# Altium PCB HQBCC2.PcbDoc
Units mm, origin at the board's own origin, x right, y up, seen from the top; angles counter-clockwise.
Board outline 90 x 50 mm, 2 copper layers (Top Layer, Bottom Layer); 38 components, 0 nets, 589 pads, 0 vias.
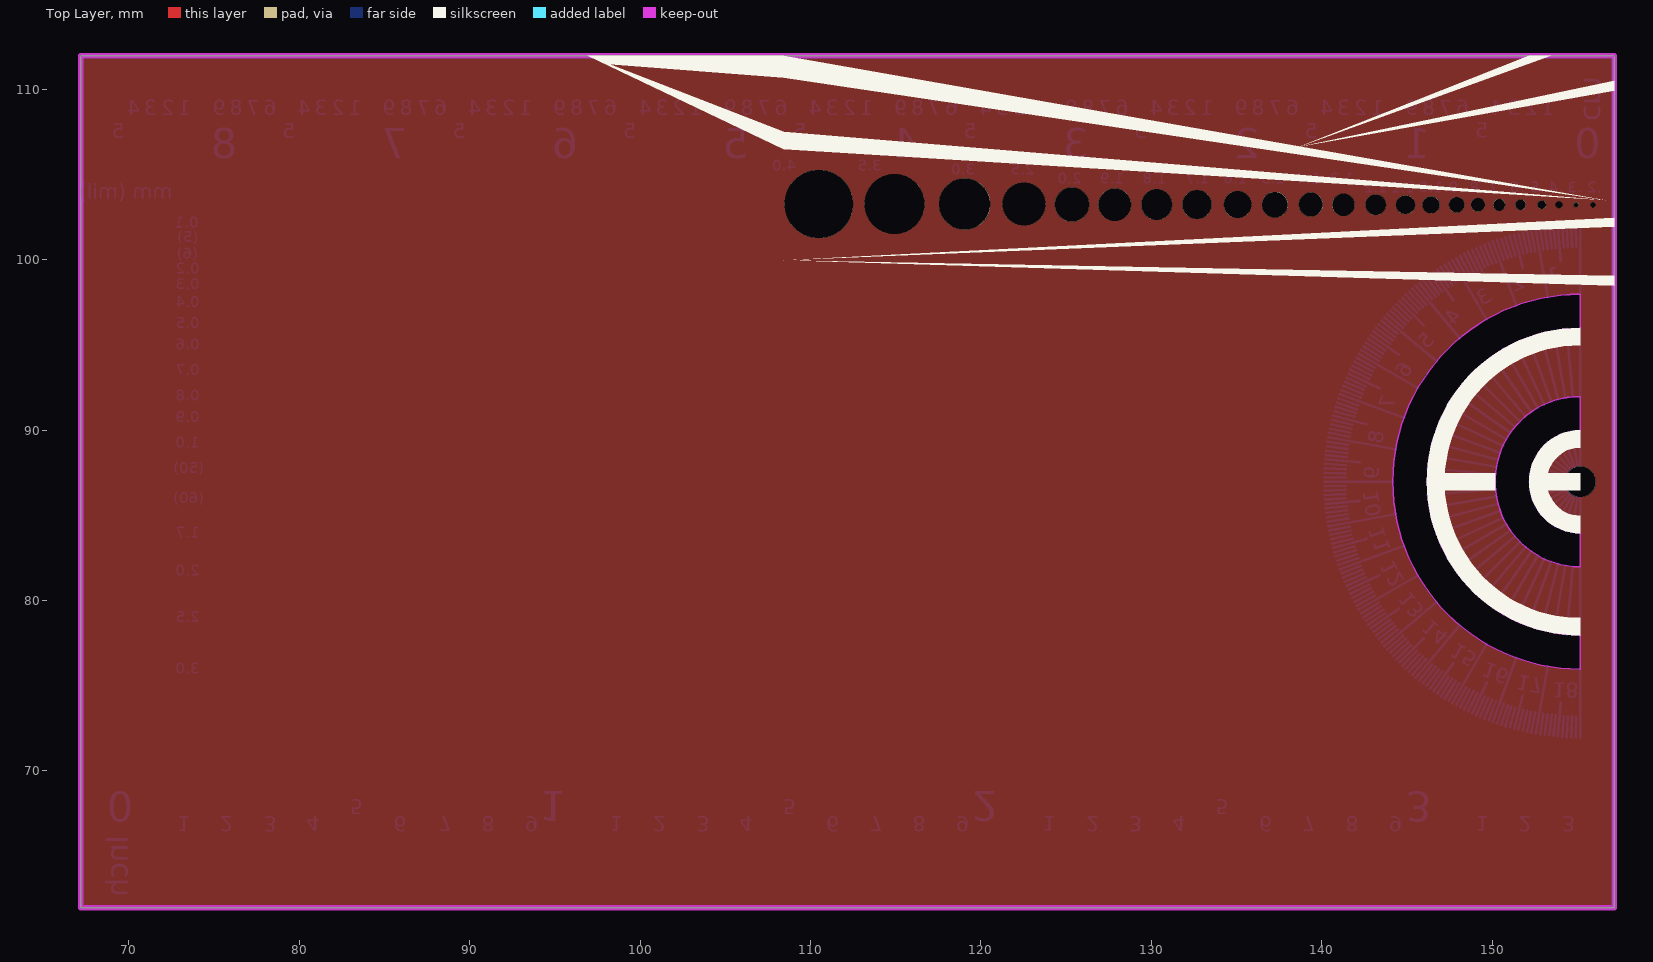
[diagram p0: Top Layer view]
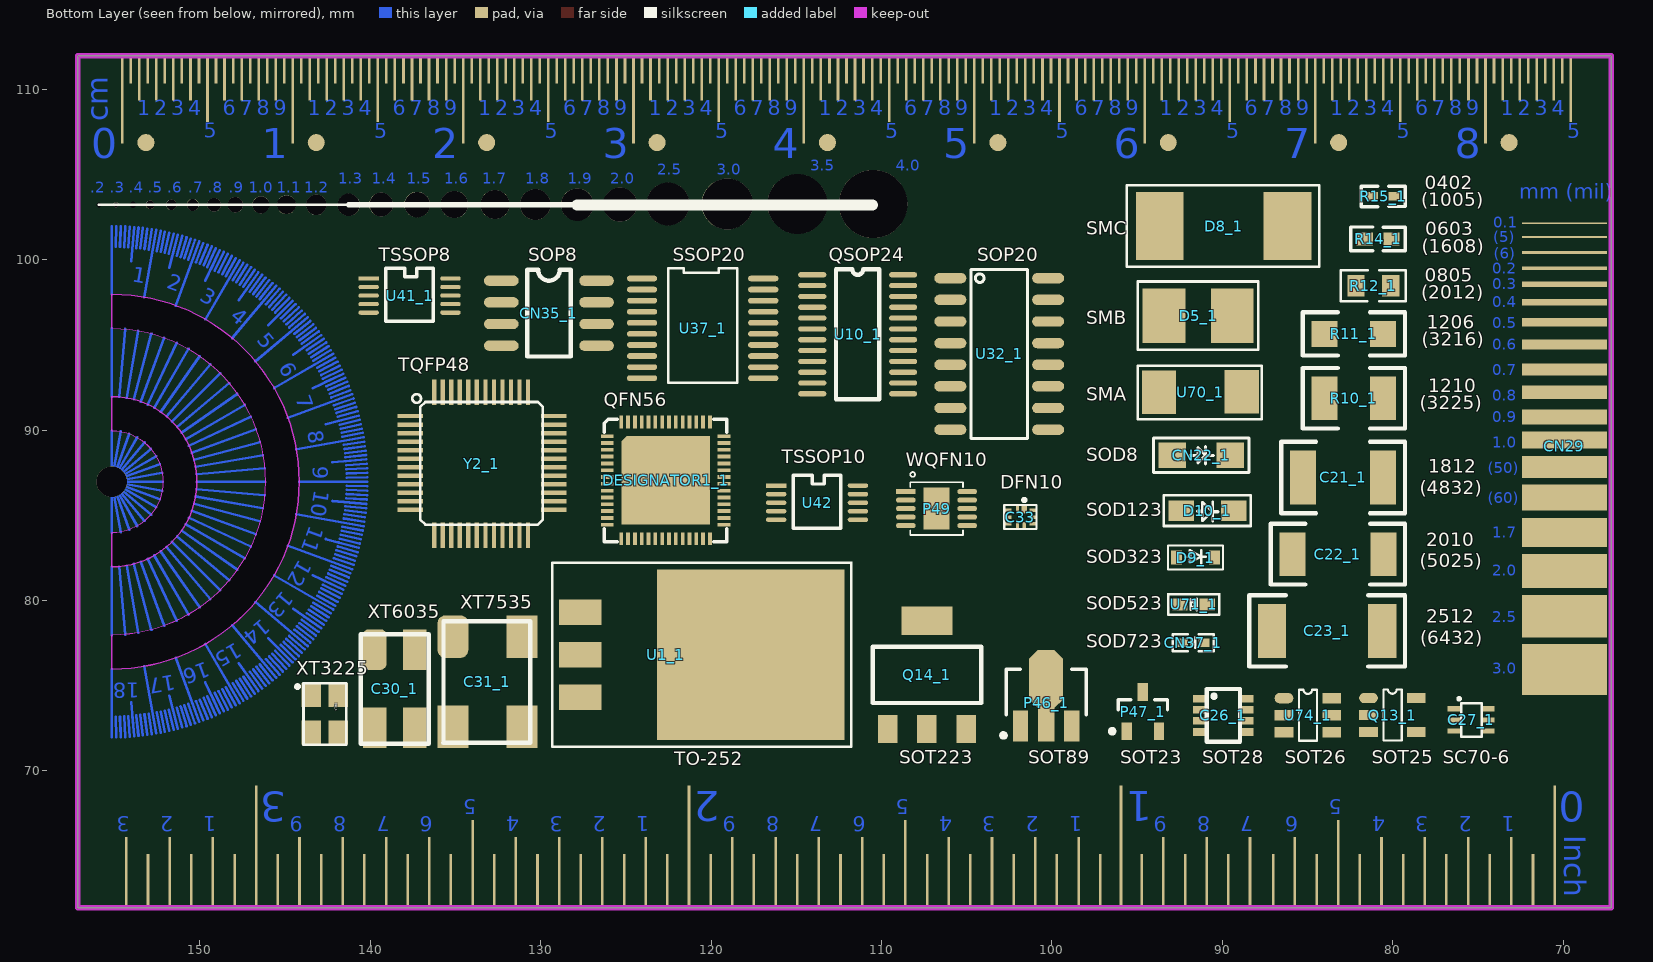
[diagram p1: Bottom Layer view, seen from below]

## Layer stack, top to bottom
Top Solder: solder mask 0.0102, Solder Resist, Dk 3.5
Top Layer: signal copper 0.0356
Dielectric 1: dielectric 0.32, FR-4, Dk 4.8
Bottom Layer: signal copper 0.0356
Bottom Solder: solder mask 0.0102, Solder Resist, Dk 3.5

## Board outline
157.175,61.976 157.175,111.976 67.175,111.976 67.175,61.976
cut-out: 155.175,77.976 155.175,75.976 cw(c155.175,86.976) 155.175,97.976 155.175,95.976 ccw(c155.175,86.976)
cut-out: 155.175,83.976 155.175,81.976 cw(c155.175,86.976) 155.175,91.976 155.175,89.976 ccw(c155.175,86.976)

## Design rules (kind name [scope] priority, off if disabled: settings)
Clearance [All] p1 off: gap=0.127 ignorepadtopadclearanceinfootprint=FALSE
ComponentClearance [All] p1 off: gap=0.254 collisioncheckmode=3 verticalgap=0.254 showdistances=FALSE
Height [All] p1 off: minheight=0 maxheight=25.4 prefheight=12.7
PolygonConnect [All] p1: connectstyle=Relief reliefconductorwidth=0.254 reliefentries=4 polygonreliefangle="90 Angle" airgapwidth=0.254
RoutingVias [All] p1: holewidth=0.711 width=1.27 viastyle="Through Hole" minholewidth=0.711 minwidth=1.27 maxholewidth=0.711 maxwidth=1.27
SolderMaskExpansion [All] p1: expansion=0.102
Width [All] p1: maxlimit=25.4 minlimit=0.152 preferedwidth=0.152
28 further rules are at their usual default settings.

## Components (designator, comment, footprint, x,y, rotation, side; value= is the part's Value field where it differs from the comment)
C21_1 "1812" 1812 82.92,87.226 r180 bottom
C22_1 "2010" 2010 83.225,82.726 r180 bottom
C23_1 "2512" 2512 83.86,78.226 r180 bottom
C26_1 "SOT28" SOT28 89.941,73.265 r180 bottom
C27_1 "SC70-6" SC70-6 75.407,72.999 r270 bottom
C30_1 "XT6035SMD" XT6035SMD 138.565,74.827 r270 bottom
C31_1 "XT7535SMD" XT7535SMD 133.153,75.589 r270 bottom
C32_1 "XT3225SMD" XT3225SMD 142.675,73.351 r270 bottom
C33 "WQFN10" WQFN10 101.825,84.901 r0 bottom
CN22_1 "IN4148" IN4148 91.242,88.527 r0 bottom
CN29 "PITCHAAAAA" PITCHAAAAA 73.406,87.917 r180 bottom
CN35_1 "SOP-8" SOP-8 132.313,98.771 r180 bottom
CN37_1 "SOD723" SOD723 91.709,77.527 r180 bottom
D5_1 "SMB" SMB 91.425,96.726 r90 bottom
D8_1 "SMC" SMC 89.922,101.976 r180 bottom
D9_1 "SOD323" SOD323 91.459,82.527 r180 bottom
D10_1 "SOD-123FL1AAA-DY" SOD-123FL1AAA-DY 90.827,85.277 r0 bottom
DESIGNATOR1_1 "QFN56" QFN56 126.175,83.551 r180 bottom
P46_1 "Comment" SOT-89 100.345,74.061 r90 bottom
P47_1 "Comment" SOT23-3 94.668,73.483 r90 bottom
P49 "Comment" DFN-10 106.775,85.401 r180 bottom
Q13_1 "SOT25" SOT25 80.025,73.23 r180 bottom
Q14_1 "SOT223" SOT223 107.335,75.645 r180 bottom
R10_1 "1210" 1210 82.285,91.876 r180 bottom
R11_1 "1206" 1206 82.285,95.651 r0 bottom
R12_1 "0805" 0805 81.138,98.476 r0 bottom
R14_1 "0603" 0603 80.864,101.226 r0 bottom
R15_1 "0402" 0402 80.56,103.726 r180 bottom
U1_1 "AIC1084AAAAAA" AIC1084AAAAAA 124.675,76.826 r270 bottom
U10_1 "QSOP24" QSOP24 111.4,95.626 r180 bottom
U32_1 "74HC139" 74HC139 103.095,94.476 r270 bottom
U37_1 "SSOP-PCM1606E" SSOP-PCM1606E 120.5,94.676 r180 bottom
U41_1 "TSSOP-10" TSSOP-10 137.7,97.901 r270 bottom
U42 "TSSOP-10" TSSOP-10 113.787,85.746 r270 bottom
U70_1 "SMA" SMA 93.425,92.226 r180 bottom
U71_1 "SOD523-DY#" SOD523-DY# 91.684,79.777 r180 bottom
U74_1 "SOT26" SOT26 84.986,73.276 r180 bottom
Y2_1 "TQFP48" TQFP48 133.5,88.076 r180 bottom

## Footprints (in the part's own frame and the unit in brackets; to place one, negate y for a bottom-side part, rotate by r counter-clockwise, add the part's x,y. Pads: shape width x height; smd on the part's side, far side on the other; paste and mask are expansions set on the pad)
74HC139 [mil]
  oval 24x74 smd: 1(-175,-113) 2(-125,-113) 3(-75,-113) 4(-25,-113) 5(25,-113) 6(75,-113) 7(125,-113) 8(175,-113) 9(175,113) 10(125,113) 11(75,113) 12(25,113) 13(-25,113) 14(-75,113) 15(-125,113) 16(-175,113)
  silkscreen extent -195,-65 195,65
0402 [mil]
  rect 25x20 smd: 1(-25,0) 2(25,0)
  silkscreen extent -51,-24 51,24
0603 [mil]
  rect 38x30 smd: 1(-31,0) 2(31,0)
  silkscreen extent -63,-28 63,28
0805 [mil]
  rect 40x50 smd: 1(-40,0) 2(40,0)
  silkscreen extent -75,-36 75,36
1206 [mil]
  rect 60x60 smd: 1(-67.5,0) 2(67.5,0)
  silkscreen extent -118,-50 118,50
1210 [mil]
  rect 60x100 smd: 1(-67.5,0) 2(67.5,0)
  silkscreen extent -118,-70 118,70
1812 [mil]
  rect 60x125 smd: 1(-92.5,0) 2(92.5,0)
  silkscreen extent -143,-83 143,83
2010 [mil]
  rect 60x100 smd: 1(-105,0) 2(105,0)
  silkscreen extent -155,-70 155,70
2512 [mil]
  rect 65x125 smd: 1(-127.5,0) 2(127.5,0)
  silkscreen extent -180,-83 180,83
AIC1084AAAAAA [mm]
  rect 1.5x2.5 smd: 1(-2.5,-3) 2(0,-3) 3(2.5,-3)
  rect 10x11 smd: 4(0,7)
  silkscreen extent -5.4,-4.65 5.4,12.9
DFN-10 [mm]
  rect 1.15x0.3 smd: 1(-1.8,1)
  oval 1.15x0.3 smd: 2(-1.8,0.5) 3(-1.8,0) 4(-1.8,-0.5) 5(-1.8,-1) 6(1.8,-1) 7(1.8,-0.5) 8(1.8,0) 9(1.8,0.5) 10(1.8,1)
  rect 1.55x2.48 smd: 11(0,0)
  silkscreen extent -1.55,-1.55 1.55,2.14, body extent -1.5,-1.5 1.5,1.5, height 0.8
IN4148 [mm]
  rect 1.6x1.5 smd: 1(-1.7,0) 2(1.7,0)
  silkscreen extent -2.81,-1 2.8,1.02
PITCHAAAAA [mm]
  rect 5x0.1 smd: 1(3.481,14.233)
  rect 5x0.127 smd: 2(3.481,13.428)
  rect 5x0.152 smd: 3(3.481,12.507)
  rect 5x0.2 smd: 4(3.481,11.589)
  rect 5x0.3 smd: 5(3.481,10.647)
  rect 5x0.4 smd: 6(3.481,9.592)
  rect 5x0.5 smd: 7(3.481,8.409)
  rect 5x0.6 smd: 8(3.481,7.105)
  rect 5x0.7 smd: 9(3.481,5.645)
  rect 5x0.8 smd: 10(3.481,4.311)
  rect 5x0.9 smd: 11(3.481,2.852)
  rect 5x1 smd: 12(3.481,1.509)
  rect 5x1.27 smd: 13(3.481,-0.081)
  rect 5x1.524 smd: 14(3.481,-1.874)
  rect 5x1.7 smd: 15(3.481,-3.915)
  rect 5x2 smd: 16(3.481,-6.191)
  rect 5x2.5 smd: 17(3.481,-8.84)
  rect 5x3 smd: 18(3.481,-11.971)
QFN56 [mm]
  rect 0.75x0.22 smd: 1(0.075,6.1) 2(0.075,5.7) 3(0.075,5.3) 4(0.075,4.9) 5(0.075,4.5) 6(0.075,4.1) 7(0.075,3.7) 8(0.075,3.3) 9(0.075,2.9) 10(0.075,2.5) 11(0.075,2.1) 12(0.075,1.7) 13(0.075,1.3) 14(0.075,0.9) 29(6.925,0.9) 30(6.925,1.3) 31(6.925,1.7) 32(6.925,2.1) 33(6.925,2.5) 34(6.925,2.9) 35(6.925,3.3) 36(6.925,3.7) 37(6.925,4.1) 38(6.925,4.5) 39(6.925,4.9) 40(6.925,5.3) 41(6.925,5.7) 42(6.925,6.1)
  rect 0.22x0.75 smd: 15(0.9,0.075) 16(1.3,0.075) 17(1.7,0.075) 18(2.1,0.075) 19(2.5,0.075) 20(2.9,0.075) 21(3.3,0.075) 22(3.7,0.075) 23(4.1,0.075) 24(4.5,0.075) 25(4.9,0.075) 26(5.3,0.075) 27(5.7,0.075) 28(6.1,0.075) 43(6.1,6.925) 44(5.7,6.925) 45(5.3,6.925) 46(4.9,6.925) 47(4.5,6.925) 48(4.1,6.925) 49(3.7,6.925) 50(3.3,6.925) 51(2.9,6.925) 52(2.5,6.925) 53(2.1,6.925) 54(1.7,6.925) 55(1.3,6.925) 56(0.9,6.925)
  rect 5.2x4.9 smd: 57(3.5,3.35)
  oct 1.2x1.2 smd: $$$1(1.5,5.5)
  rect 4.5x0.3 smd: $$$2(3.85,5.95)
  silkscreen extent -0.1,-0.1 7.1,7.1
QSOP24 [mil]
  oval 65x12 smd: 1(-105,137.5) 2(-105,112.5) 3(-105,87.5) 4(-105,62.5) 5(-105,37.5) 6(-105,12.5) 7(-105,-12.5) 8(-105,-37.5) 9(-105,-62.5) 10(-105,-87.5) 11(-105,-112.5) 12(-105,-137.5) 13(105,-137.5) 14(105,-112.5) 15(105,-87.5) 16(105,-62.5) 17(105,-37.5) 18(105,-12.5) 19(105,12.5) 20(105,37.5) 21(105,62.5) 22(105,87.5) 23(105,112.5) 24(105,137.5)
  silkscreen extent -50,-150 50,150
SC70-6 [mm]
  rect 0.3x0.8 smd: 1(-0.65,-0.975) 2(0,-0.975) 3(0.65,-0.975) 4(0.65,0.975) 5(0,0.975) 6(-0.65,0.975)
  silkscreen extent -1.32,-0.78 0.98,0.63
SMA [mm]
  rect 2x2.54 smd: 1(4.562,0.022) 2(-0.297,0.001)
  silkscreen extent -1.54,-1.58 5.74,1.55
SMB [mm]
  rect 3.2x2.5 smd: 1(0,2) 2(0,-2)
  silkscreen extent -2,-3.53 2,3.55
SMC [mm]
  rect 2.8x4 smd: 1(3.746,0) 2(-3.746,0)
  silkscreen extent -5.7,-2.4 5.6,2.4
SOD323 [mm]
  rect 0.63x0.83 smd: 1(-1.235,-0.001) 2(0.995,-0.001)
  silkscreen extent -1.74,-0.7 1.5,0.7
SOD523-DY# [mm]
  rect 0.9x0.7 smd: 1(-0.8,0) 2(0.8,0)
  silkscreen extent -1.5,-0.61 1.5,0.6
SOD723 [mil]
  rect 25x20 smd: 1(-25,0) 2(25,0)
  silkscreen extent -47,-20 47,20
SOD-123FL1AAA-DY [mm]
  rect 1.5x1.2 smd: 1(-1.5,0) 2(1.6,0)
  silkscreen extent -2.5,-0.9 2.61,0.9
SOP-8 [mil]
  oval 80x24 smd: 1(0,0) 2(0,-50) 3(0,-100) 4(0,-150) 5(220,-150) 6(220,-100) 7(220,-50) 8(220,0)
  silkscreen extent 60,-175 160,25
SOT23-3 [mm] "SOT23, 3-Leads, Body 3.0x2.5mm (max), Pitch 0.95mm, IPC Medium Density"
  rect 1.05x0.6 smd: 1(-1.15,0.95) 2(-1.15,-0.95) 3(1.15,0)
  silkscreen extent -1.27,-1.45 0.7,1.93, body extent -1.2,-1.45 1.2,1.45, height 1
SOT25 [mm]
  oval 1.1x0.6 smd: 1(-1.4,1.052)
  rect 1.1x0.6 smd: 2(-1.4,0.052) 3(-1.4,-0.948) 4(1.4,-0.948) 5(1.4,1.052)
  silkscreen extent -0.52,-1.45 0.55,1.55
SOT26 [mm]
  oval 1.1x0.6 smd: 1(-1.4,0.996)
  rect 1.1x0.6 smd: 2(-1.4,-0.004) 3(-1.4,-1.004) 4(1.4,-1.004) 5(1.4,-0.004) 6(1.4,0.996)
  silkscreen extent -0.52,-1.5 0.55,1.5
SOT28 [mm]
  rect 0.8x0.45 smd: 1(-1.375,0.975) 2(-1.375,0.325) 3(-1.375,-0.325) 4(-1.375,-0.975) 5(1.375,-0.975) 6(1.375,-0.325) 7(1.375,0.325) 8(1.375,0.975)
  silkscreen extent -0.97,-1.55 0.97,1.55
SOT223 [mil]
  rect 45x65 smd: 1(-91,-125) 2(0,-125) 3(91,-125)
  rect 118x65 smd: 4(0,125)
  silkscreen extent -125,-65 125,65
SOT-89 [mm] "SOT89, 3-Leads, Body 4.5x2.5mm (max), Pitch 1.50mm, Lead Span 3.6mm, IPC Medium Density"
  rect 1.8x0.9 smd: 1(-1.425,1.5) 3(-1.425,-1.5)
  rect 2x0.96 smd: 2(-1.325,0)
  oct 3.4x2 smd: 2(1.325,0)
  silkscreen extent -2.1,-2.35 1.91,2.63, body extent -1.9,-2.35 2.4,2.35, height 1.65
SSOP-PCM1606E [mil]
  oval 70x13 smd: 1(-140,166.4) 2(-140,140.8) 3(-140,115.2) 4(-140,89.6) 5(-140,64) 6(-140,38.4) 7(-140,12.8) 8(-140,-12.8) 9(-140,-38.4) 10(-140,-64) 11(140,-64) 12(140,-38.4) 13(140,-12.8) 14(140,12.8) 15(140,38.4) 16(140,64) 17(140,89.6) 18(140,115.2) 19(140,140.8) 20(140,166.4)
  silkscreen extent -80,-75 80,190
TQFP48 [mm]
  rect 1.5x0.25 smd: 1(-4.15,2.75) 2(-4.15,2.25) 3(-4.15,1.75) 4(-4.15,1.25) 5(-4.15,0.75) 6(-4.15,0.25) 7(-4.15,-0.25) 8(-4.15,-0.75) 9(-4.15,-1.25) 10(-4.15,-1.75) 11(-4.15,-2.25) 12(-4.15,-2.75) 25(4.25,-2.75) 26(4.25,-2.25) 27(4.25,-1.75) 28(4.25,-1.25) 29(4.25,-0.75) 30(4.25,-0.25) 31(4.25,0.25) 32(4.25,0.75) 33(4.25,1.25) 34(4.25,1.75) 35(4.25,2.25) 36(4.25,2.75)
  rect 0.25x1.5 smd: 13(-2.75,-4.25) 14(-2.25,-4.25) 15(-1.75,-4.25) 16(-1.25,-4.25) 17(-0.75,-4.25) 18(-0.25,-4.25) 19(0.25,-4.25) 20(0.75,-4.25) 21(1.25,-4.25) 22(1.75,-4.25) 23(2.25,-4.25) 24(2.75,-4.25) 37(2.75,4.15) 38(2.25,4.15) 39(1.75,4.15) 40(1.25,4.15) 41(0.75,4.15) 42(0.25,4.15) 43(-0.25,4.15) 44(-0.75,4.15) 45(-1.25,4.15) 46(-1.75,4.15) 47(-2.25,4.15) 48(-2.75,4.15)
  silkscreen extent -4.04,-3.62 3.62,4.04
TSSOP-10 [mm]
  rect 0.254x1.2 smd: 1(-1,-2.4)
  oval 0.254x1.2 smd: 2(-0.5,-2.4) 3(0,-2.4) 4(0.5,-2.4) 5(1,-2.4) 6(1,2.4) 7(0.5,2.4) 8(0,2.4) 9(-0.5,2.4) 10(-1,2.4)
  silkscreen extent -1.6,-1.4 1.5,1.4
WQFN10 [mm]
  rect 0.3x0.5 smd: 1(-0.2,-0.45)
  rect 0.2x0.4 smd: 2(0.2,-0.5) 6(0.2,0.5) 7(-0.2,0.5)
  rect 0.4x0.2 smd: 3(0.762,-0.4) 4(0.762,0) 5(0.762,0.4) 8(-0.7,0.4) 9(-0.7,0) 10(-0.7,-0.4)
  silkscreen extent -0.91,-1.08 0.98,0.7
XT3225SMD [mm]
  rect 1.4x1.15 smd: 1(-1.1,-0.8) 2(1.1,-0.8) 3(1.1,0.8) 4(-1.1,0.8)
  silkscreen extent -1.8,-1.7 1.8,1.25
XT6035SMD [mm]
  rrect50% 2.38x1.38 smd: 1(-2.3,-1.18)
  rect 2.38x1.38 smd: 2(2.3,1.18) 3(-2.3,1.18) 4(2.3,-1.18)
  silkscreen extent -3.2,-2 3.23,2
XT7535SMD [mm]
  rrect50% 2.5x1.8 smd: 1(-2.3,-2)
  rect 2.5x1.8 smd: 2(3,2.05) 3(-2.3,2.05) 4(3,-2)
  silkscreen extent -3.2,-2.57 3.94,2.54

## Free pads (board coordinates)
  round 0.2 hole 0.3 unplated: 22(155.925,103.226)
  round 0.3 hole 0.3 unplated: 23(154.925,103.226)
  round 0.3 hole 0.4 unplated: 24(153.925,103.226)
  round 0.6 hole 0.6 unplated: 25(151.675,103.226)
  round 0.5 hole 0.5 unplated: 25(152.925,103.226)
  round 0.7 hole 0.7 unplated: 26(150.425,103.226)
  round 0.8 hole 0.8 unplated: 27(149.175,103.226)
  round 0.9 hole 0.9 unplated: 28(147.925,103.226)
  round 1 hole 1 unplated: 29(146.425,103.226)
  round 1.1 hole 1.1 unplated: 30(144.925,103.226)
  round 1.2 hole 1.2 unplated: 31(143.175,103.226)
  round 1.3 hole 1.3 unplated: 32(141.275,103.226)
  round 2 hole 2 unplated: 33(125.345,103.24)
  round 1.9 hole 1.9 unplated: 34(127.86,103.24)
  round 1 smd far side: 35(73.175,106.876) 35(83.175,106.876) 35(93.175,106.876) 35(103.175,106.876) 35(113.175,106.876) 35(123.175,106.876) 35(133.175,106.876) 35(143.175,106.876) 35(153.175,106.876)
  round 1.8 hole 1.8 unplated: 35(130.324,103.24) 35(155.175,86.976)
  round 1.7 hole 1.7 unplated: 36(132.686,103.24)
  round 1.6 hole 1.6 unplated: 37(135.073,103.24)
  round 1.5 hole 1.5 unplated: 38(137.258,103.24)
  round 1.4 hole 1.4 unplated: 39(139.366,103.24)
  round 3 hole 3 unplated: 40(119.053,103.274)
  round 2.5 hole 2.5 unplated: 41(122.533,103.274)
  round 3.5 hole 3.5 unplated: 42(114.938,103.274)
  round 4 hole 4 unplated: 43(110.493,103.274)
  rect 0.15x4 smd far side: 275(154.321,64.137) 277(151.781,64.137) 279(149.241,64.137) 283(144.161,64.137) 285(141.621,64.137) 287(139.081,64.137) 289(136.541,64.137) 293(131.461,64.137) 295(128.921,64.137) 297(126.381,64.137) 299(123.841,64.137) 303(118.761,64.137) 305(116.221,64.137) 307(113.681,64.137) 309(111.141,64.137) 313(106.061,64.137) 315(103.521,64.137) 317(100.981,64.137) 319(98.441,64.137) 323(93.461,64.137) 325(90.921,64.137) 327(88.381,64.137) 329(85.741,64.137) 333(80.661,64.137) 335(78.121,64.137) 337(75.581,64.137) 339(73.041,64.137)
  rect 0.15x3 smd far side: 276(153.051,63.637) 278(150.511,63.637) 280(147.971,63.637) 282(145.431,63.637) 284(142.891,63.637) 286(140.351,63.637) 288(137.811,63.637) 290(135.271,63.637) 292(132.731,63.637) 294(130.191,63.637) 296(127.651,63.637) 298(125.111,63.637) 300(122.571,63.637) 302(120.031,63.637) 304(117.491,63.637) 306(114.951,63.637) 308(112.411,63.637) 310(109.871,63.637) 312(107.331,63.637) 314(104.791,63.637) 316(102.251,63.637) 318(99.711,63.637) 320(97.171,63.637) 322(94.731,63.637) 324(92.191,63.637) 326(89.651,63.637) 328(87.011,63.637) 330(84.471,63.637) 332(81.931,63.637) 334(79.391,63.637) 336(76.851,63.637) 338(74.311,63.637) 340(71.771,63.637)
  rect 0.15x7 smd far side: 281(146.701,65.637) 301(95.951,65.637) 301(121.301,65.637) 341(70.501,65.637)
  rect 0.15x5 smd far side: 291(134.001,64.637) 311(108.601,64.637) 331(83.201,64.637)
  rect 0.152x5 smd far side: 362(154.559,109.337) 372(144.559,109.337) 382(134.559,109.337) 392(124.559,109.337) 402(114.559,109.337) 412(104.559,109.337) 422(94.559,109.337) 432(84.559,109.337) 442(74.559,109.337)
  rect 0.152x2.5 smd far side: 363(153.559,110.587) 364(152.559,110.587) 365(151.559,110.587) 366(150.559,110.587) 368(148.559,110.587) 369(147.559,110.587) 370(146.559,110.587) 371(145.559,110.587) 373(143.559,110.587) 374(142.559,110.587) 375(141.559,110.587) 376(140.559,110.587) 378(138.559,110.587) 379(137.559,110.587) 380(136.559,110.587) 381(135.559,110.587) 383(133.559,110.587) 384(132.559,110.587) 385(131.559,110.587) 386(130.559,110.587) 388(128.559,110.587) 389(127.559,110.587) 390(126.559,110.587) 391(125.559,110.587) 393(123.559,110.587) 394(122.559,110.587) 395(121.559,110.587) 396(120.559,110.587) 398(118.559,110.587) 399(117.559,110.587) 400(116.559,110.587) 401(115.559,110.587) 403(113.559,110.587) 404(112.559,110.587) 405(111.559,110.587) 406(110.559,110.587) 408(108.559,110.587) 409(107.559,110.587) 410(106.559,110.587) 411(105.559,110.587) 413(103.559,110.587) 414(102.559,110.587) 415(101.559,110.587) 416(100.559,110.587) 418(98.559,110.587) 419(97.559,110.587) 420(96.559,110.587) 421(95.559,110.587) 423(93.559,110.587) 424(92.559,110.587) 425(91.559,110.587) 426(90.559,110.587) 428(88.559,110.587) 429(87.559,110.587) 430(86.559,110.587) 431(85.559,110.587) 433(83.559,110.587) 434(82.559,110.587) 435(81.559,110.587) 436(80.559,110.587) 438(78.559,110.587) 439(77.559,110.587) 440(76.559,110.587) 441(75.559,110.587) 443(73.559,110.587) 444(72.559,110.587) 445(71.559,110.587) 446(70.559,110.587)
  rect 0.152x3.75 smd far side: 367(149.559,109.962) 377(139.559,109.962) 387(129.559,109.962) 397(119.559,109.962) 407(109.559,109.962) 417(99.559,109.962) 427(89.559,109.962) 437(79.559,109.962) 447(69.559,109.962)
  rect 0.152x1.5 smd far side: 563(154.059,111.087) 564(153.059,111.087) 565(152.059,111.087) 566(151.059,111.087) 567(150.059,111.087) 568(149.059,111.087) 569(148.059,111.087) 570(147.059,111.087) 571(146.059,111.087) 572(145.059,111.087) 573(144.059,111.087) 574(143.059,111.087) 575(142.059,111.087) 576(141.059,111.087) 577(140.059,111.087) 578(139.059,111.087) 579(138.059,111.087) 580(137.059,111.087) 581(136.059,111.087) 582(135.059,111.087) 583(134.059,111.087) 584(133.059,111.087) 585(132.059,111.087) 586(131.059,111.087) 587(130.059,111.087) 588(129.059,111.087) 589(128.059,111.087) 590(127.059,111.087) 591(126.059,111.087) 592(125.059,111.087) 593(124.059,111.087) 594(123.059,111.087) 595(122.059,111.087) 596(121.059,111.087) 597(120.059,111.087) 598(119.059,111.087) 599(118.059,111.087) 600(117.059,111.087) 601(116.059,111.087) 602(115.059,111.087) 603(114.059,111.087) 604(113.059,111.087) 605(112.059,111.087) 606(111.059,111.087) 607(110.059,111.087) 608(109.059,111.087) 609(108.059,111.087) 610(107.059,111.087) 611(106.059,111.087) 612(105.059,111.087) 613(104.059,111.087) 614(103.059,111.087) 615(102.059,111.087) 616(101.059,111.087) 617(100.059,111.087) 618(99.059,111.087) 619(98.059,111.087) 620(97.059,111.087) 621(96.059,111.087) 622(95.059,111.087) 623(94.059,111.087) 624(93.059,111.087) 625(92.059,111.087) 626(91.059,111.087) 627(90.059,111.087) 628(89.059,111.087) 629(88.059,111.087) 630(87.059,111.087) 631(86.059,111.087) 632(85.059,111.087) 633(84.059,111.087) 634(83.059,111.087) 635(82.059,111.087) 636(81.059,111.087) 637(80.059,111.087) 638(79.059,111.087) 639(78.059,111.087) 640(77.059,111.087) 641(76.059,111.087) 642(75.059,111.087) 643(74.059,111.087) 644(73.059,111.087) 645(72.059,111.087) 646(71.059,111.087) 647(70.059,111.087)

## Nets (pads, with @x,y where several pads share a name; then routed paths per layer and width w, separated by ;. In a path a pad name is that pad's centre, name@x,y a point inside that pad or via, vN(x,y) a via of type N, cw(c..) or ccw(c..) an arc to the next point about the centre after c; other vN are vias at no path point)
pads on no net: C21_1.1 C21_1.2 C22_1.1 C22_1.2 C23_1.1 C23_1.2 C26_1.1 C26_1.2 C26_1.3 C26_1.4 C26_1.5 C26_1.6 C26_1.7 C26_1.8 C27_1.1 C27_1.2 C27_1.3 C27_1.4 C27_1.5 C27_1.6 C30_1.1 C30_1.2 C30_1.3 C30_1.4 C31_1.1 C31_1.2 C31_1.3 C31_1.4 C32_1.1 C32_1.2 C32_1.3 C32_1.4 C33.1 C33.2 C33.3 C33.4 C33.5 C33.6 C33.7 C33.8 C33.9 C33.10 CN22_1.1 CN22_1.2 CN29.1 CN29.2 CN29.3 CN29.4 CN29.5 CN29.6 CN29.7 CN29.8 CN29.9 CN29.10 CN29.11 CN29.12 CN29.13 CN29.14 CN29.15 CN29.16 CN29.17 CN29.18 CN35_1.1 CN35_1.2 CN35_1.3 CN35_1.4 CN35_1.5 CN35_1.6 CN35_1.7 CN35_1.8 CN37_1.1 CN37_1.2 D5_1.1 D5_1.2 D8_1.1 D8_1.2 D9_1.1 D9_1.2 D10_1.1 D10_1.2 DESIGNATOR1_1.1 DESIGNATOR1_1.2 DESIGNATOR1_1.3 DESIGNATOR1_1.4 DESIGNATOR1_1.5 DESIGNATOR1_1.6 DESIGNATOR1_1.7 DESIGNATOR1_1.8 DESIGNATOR1_1.9 DESIGNATOR1_1.10 DESIGNATOR1_1.11 DESIGNATOR1_1.12 DESIGNATOR1_1.13 DESIGNATOR1_1.14 DESIGNATOR1_1.15 DESIGNATOR1_1.16 DESIGNATOR1_1.17 DESIGNATOR1_1.18 DESIGNATOR1_1.19 DESIGNATOR1_1.20 DESIGNATOR1_1.21 DESIGNATOR1_1.22 DESIGNATOR1_1.23 DESIGNATOR1_1.24 DESIGNATOR1_1.25 DESIGNATOR1_1.26 DESIGNATOR1_1.27 DESIGNATOR1_1.28 DESIGNATOR1_1.29 DESIGNATOR1_1.30 DESIGNATOR1_1.31 DESIGNATOR1_1.32 DESIGNATOR1_1.33 DESIGNATOR1_1.34 DESIGNATOR1_1.35 DESIGNATOR1_1.36 DESIGNATOR1_1.37 DESIGNATOR1_1.38 DESIGNATOR1_1.39 DESIGNATOR1_1.40 DESIGNATOR1_1.41 DESIGNATOR1_1.42 DESIGNATOR1_1.43 DESIGNATOR1_1.44 DESIGNATOR1_1.45 DESIGNATOR1_1.46 DESIGNATOR1_1.47 DESIGNATOR1_1.48 DESIGNATOR1_1.49 DESIGNATOR1_1.50 DESIGNATOR1_1.51 DESIGNATOR1_1.52 DESIGNATOR1_1.53 DESIGNATOR1_1.54 DESIGNATOR1_1.55 DESIGNATOR1_1.56 DESIGNATOR1_1.57 DESIGNATOR1_1.$$$1 DESIGNATOR1_1.$$$2 P46_1.1 P46_1.2 P46_1.3 P47_1.1 P47_1.2 P47_1.3 P49.1 P49.2 P49.3 P49.4 P49.5 P49.6 P49.7 P49.8 P49.9 P49.10 P49.11 Q13_1.1 Q13_1.2 Q13_1.3 Q13_1.4 Q13_1.5 Q14_1.1 Q14_1.2 Q14_1.3 Q14_1.4 R10_1.1 R10_1.2 R11_1.1 R11_1.2 R12_1.1 R12_1.2 R14_1.1 R14_1.2 R15_1.1 R15_1.2 U1_1.1 U1_1.2 U1_1.3 U1_1.4 U10_1.1 U10_1.2 U10_1.3 U10_1.4 U10_1.5 U10_1.6 U10_1.7 U10_1.8 U10_1.9 U10_1.10 U10_1.11 U10_1.12 U10_1.13 U10_1.14 U10_1.15 U10_1.16 U10_1.17 U10_1.18 U10_1.19 U10_1.20 U10_1.21 U10_1.22 U10_1.23 U10_1.24 U32_1.1 U32_1.2 U32_1.3 U32_1.4 U32_1.5 U32_1.6 U32_1.7 U32_1.8 U32_1.9 U32_1.10 U32_1.11 U32_1.12 U32_1.13 U32_1.14 U32_1.15 U32_1.16 U37_1.1 U37_1.2 U37_1.3 U37_1.4 U37_1.5 U37_1.6 U37_1.7 U37_1.8 U37_1.9 U37_1.10 U37_1.11 U37_1.12 U37_1.13 U37_1.14 U37_1.15 U37_1.16 U37_1.17 U37_1.18 U37_1.19 U37_1.20 U41_1.1 U41_1.2 U41_1.3 U41_1.4 U41_1.5 U41_1.6 U41_1.7 U41_1.8 U41_1.9 U41_1.10 U42.1 U42.2 U42.3 U42.4 U42.5 U42.6 U42.7 U42.8 U42.9 U42.10 U70_1.1 U70_1.2 U71_1.1 U71_1.2 U74_1.1 U74_1.2 U74_1.3 U74_1.4 U74_1.5 U74_1.6 Y2_1.1 Y2_1.2 Y2_1.3 Y2_1.4 Y2_1.5 Y2_1.6 Y2_1.7 Y2_1.8 Y2_1.9 Y2_1.10 Y2_1.11 Y2_1.12 Y2_1.13 Y2_1.14 Y2_1.15 Y2_1.16 Y2_1.17 Y2_1.18 Y2_1.19 Y2_1.20 Y2_1.21 Y2_1.22 Y2_1.23 Y2_1.24 Y2_1.25 Y2_1.26 Y2_1.27 Y2_1.28 Y2_1.29 Y2_1.30 Y2_1.31 Y2_1.32 Y2_1.33 Y2_1.34 Y2_1.35 Y2_1.36 Y2_1.37 Y2_1.38 Y2_1.39 Y2_1.40 Y2_1.41 Y2_1.42 Y2_1.43 Y2_1.44 Y2_1.45 Y2_1.46 Y2_1.47 Y2_1.48
copper on no net: | length 506.6
  Bottom Layer w0.152: 140.175,86.976 144.175,86.976 ; 140.177,86.714 141.385,86.735 ; 140.177,87.238 141.385,87.217 ; 140.184,86.453 141.391,86.495 ; 140.184,87.5 141.391,87.457 ; 140.195,86.191 141.402,86.254 ; 140.195,87.761 141.402,87.698 ; 140.211,85.93 141.416,86.014 ; 140.211,88.023 141.416,87.938 ; 140.257,85.408 141.458,85.534 ; 140.257,88.544 141.458,88.418 ; 140.287,85.148 141.485,85.295 ; 140.287,88.804 141.485,88.657 ; 140.321,84.889 141.517,85.057 ; 140.321,89.064 141.517,88.896 ; 140.36,84.63 141.552,84.819 ; 140.36,89.323 141.552,89.134 ; 140.403,84.371 144.342,85.066 ; 140.403,89.581 144.342,88.886 ; 140.45,84.114 141.636,84.344 ; 140.45,89.838 141.636,89.608 ; 140.503,83.857 141.684,84.109 ; 140.503,90.095 141.684,89.844 ; 140.559,83.602 141.736,83.874 ; 140.559,90.35 141.736,90.079 ; 140.62,83.347 141.792,83.64 ; 140.62,90.605 141.792,90.313 ; 140.756,82.842 141.917,83.175 ; 140.756,91.111 141.917,90.778 ; 140.83,82.591 141.985,82.944 ; 140.83,91.362 141.985,91.009 ; 140.909,82.341 142.058,82.714 ; 140.909,91.611 142.058,91.238 ; 140.992,82.093 142.134,82.486 ; 140.992,91.86 142.134,91.466 ; 141.079,81.846 144.838,83.214 ; 141.079,92.106 144.838,90.738 ; 141.171,81.601 142.299,82.033 ; 141.171,92.352 142.299,91.919 ; 141.267,81.357 142.387,81.81 ; 141.267,92.595 142.387,92.143 ; 141.367,81.115 142.479,81.587 ; 141.367,92.837 142.479,92.365 ; 141.435,85.774 140.232,85.669 142.224,85.843 ; 141.435,88.178 140.232,88.284 142.224,88.109 ; 141.472,80.875 142.575,81.366 ; 141.472,93.077 142.575,92.586 ; 141.58,93.315 143.393,92.47 ; 141.58,93.315 142.675,92.805 ; 141.693,80.401 142.779,80.93 ; 141.693,93.552 142.779,93.022 ; 141.81,80.166 142.886,80.715 ; 141.81,93.786 142.886,93.238 ; 141.853,83.406 140.686,83.094 142.618,83.612 ; 141.853,90.546 140.686,90.858 142.618,90.341 ; 141.931,79.934 142.997,80.501 ; 141.931,94.018 142.997,93.451 ; 142.056,79.704 143.112,80.29 ; 142.056,94.248 143.112,93.663 ; 142.184,79.476 145.649,81.476 ; 142.184,94.476 145.649,92.476 ; 142.317,79.251 143.353,79.873 ; 142.317,94.702 143.353,94.08 ; 142.454,79.027 143.478,79.667 ; 142.454,94.925 143.478,94.285 ; 142.595,78.807 143.608,79.464 ; 142.595,95.146 143.608,94.488 ; 142.675,81.147 141.58,80.637 143.393,81.482 ; 142.739,78.588 143.741,79.264 ; 142.739,95.364 143.741,94.689 ; 143.04,78.159 144.017,78.869 ; 143.04,95.793 144.017,95.083 ; 143.195,77.949 144.16,78.676 ; 143.195,96.003 144.16,95.276 ; 143.355,77.741 144.306,78.485 ; 143.355,96.211 144.306,95.467 ; 143.518,77.536 144.456,78.296 ; 143.518,96.416 144.456,95.656 ; 143.684,77.334 146.748,79.905 ; 143.684,96.618 146.748,94.047 ; 143.854,77.135 144.766,77.928 ; 143.854,96.817 144.766,96.025 ; 143.877,79.065 142.888,78.373 144.526,79.52 ; 143.877,94.887 142.888,95.58 144.526,94.433 ; 144.028,76.939 144.925,77.747 ; 144.028,97.013 144.925,96.205 ; 144.205,76.746 145.088,77.57 ; 144.205,97.206 145.088,96.382 ; 144.385,76.556 145.254,77.395 ; 144.385,97.396 145.254,96.557 ; 144.755,76.186 145.594,77.055 ; 144.755,97.766 145.594,96.897 ; 144.945,76.006 145.769,76.889 ; 144.945,97.946 145.769,97.063 ; 145.138,75.829 145.946,76.727 ; 145.138,98.123 145.946,97.226 ; 145.334,75.656 146.126,76.567 ; 145.334,98.297 146.126,97.385 ; 145.422,77.224 144.568,76.37 145.982,77.784 ; 145.422,96.729 144.568,97.583 145.982,96.169 ; 145.533,75.485 148.104,78.55 ; 145.533,98.467 148.104,95.403 ; 145.735,75.319 146.495,76.258 ; 145.735,98.633 146.495,97.695 ; 145.94,75.156 146.684,76.108 ; 145.94,98.796 146.684,97.845 ; 146.148,74.997 146.875,75.961 ; 146.148,98.956 146.874,97.991 ; 146.209,86.192 150.194,86.54 ; 146.209,87.761 150.194,87.412 ; 146.312,85.413 150.251,86.108 ; 146.312,88.539 150.251,87.844 ; 146.358,74.841 147.068,75.818 ; 146.358,99.111 147.068,98.134 ; 146.482,84.647 150.345,85.682 ; 146.482,89.306 150.345,88.27 ; 146.718,83.898 150.476,85.266 ; 146.718,90.054 150.476,88.686 ; 146.787,74.541 147.462,75.542 ; 146.787,99.412 147.462,98.41 ; 147.005,74.396 147.663,75.409 ; 147.005,99.556 147.663,98.543 ; 147.018,83.173 150.643,84.863 ; 147.018,90.78 150.643,89.089 ; 147.226,74.255 147.866,75.28 ; 147.226,99.697 147.866,98.673 ; 147.264,75.678 146.571,74.689 147.718,76.327 ; 147.264,98.274 146.571,99.263 147.718,97.625 ; 147.381,82.476 150.845,84.476 ; 147.381,91.476 150.845,89.476 ; 147.449,74.119 148.071,75.154 ; 147.449,99.834 148.071,98.798 ; 147.675,73.986 149.675,77.45 ; 147.675,99.967 149.675,96.502 ; 147.802,81.814 151.079,84.108 ; 147.802,92.138 151.079,89.844 ; 147.903,73.857 148.488,74.913 ; 147.903,100.095 148.488,99.039 ; 148.133,73.732 148.7,74.798 ; 148.133,100.22 148.7,99.154 ; 148.28,81.191 151.345,83.762 ; 148.28,92.761 151.345,90.19 ; 148.365,73.611 148.913,74.687 ; 148.365,100.341 148.913,99.265 ; 148.599,73.494 149.129,74.58 ; 148.599,100.458 149.129,99.372 ; 148.811,80.612 151.639,83.441 ; 148.811,93.34 151.639,90.512 ; 149.074,73.273 149.565,74.376 ; 149.074,100.679 149.565,99.576 ; 149.314,73.169 149.786,74.28 ; 149.314,100.784 149.786,99.672 ; 149.346,74.476 148.836,73.382 149.681,75.194 ; 149.346,99.476 148.836,100.571 149.681,98.758 ; 149.39,80.082 151.961,83.146 ; 149.39,93.871 151.961,90.806 ; 149.556,73.068 150.008,74.188 ; 149.556,100.884 150.008,99.764 ; 149.799,72.972 150.232,74.1 ; 149.799,100.98 150.232,99.852 ; 150.013,79.604 152.307,82.88 ; 150.013,94.349 152.307,91.072 ; 150.045,72.881 151.413,76.64 ; 150.045,101.072 151.413,97.313 ; 150.291,72.793 150.685,73.935 ; 150.291,101.159 150.685,100.017 ; 150.54,72.71 150.913,73.859 ; 150.54,101.242 150.913,100.093 ; 150.675,79.182 152.675,82.646 ; 150.675,94.77 152.675,91.306 ; 150.789,72.632 151.142,73.787 ; 150.789,101.321 151.142,100.166 ; 151.04,72.557 151.373,73.718 ; 151.04,101.395 151.373,100.234 ; 151.371,78.819 153.062,82.445 ; 151.371,95.133 153.062,91.508 ; 151.546,72.422 151.838,73.594 ; 151.546,101.531 151.838,100.359 ; 151.605,73.654 151.293,72.487 151.81,74.419 ; 151.605,100.298 151.293,101.465 151.81,99.533 ; 151.801,72.361 152.072,73.537 ; 151.801,101.592 152.072,100.415 ; 152.056,72.304 152.307,73.485 ; 152.056,101.648 152.307,100.467 ; 152.097,78.519 153.465,82.278 ; 152.097,95.433 153.465,91.675 ; 152.22,86.456 154.288,86.82 ; 152.22,87.497 154.289,87.133 ; 152.313,72.252 152.543,73.437 ; 152.313,101.701 152.543,100.515 ; 152.356,85.95 154.329,86.669 ; 152.356,88.003 154.329,87.284 ; 152.57,72.204 153.265,76.143 ; 152.57,101.748 153.265,97.809 ; 152.577,85.476 154.395,86.526 ; 152.577,88.476 154.396,87.426 ; 152.828,72.161 153.017,73.354 ; 152.828,101.791 153.017,100.599 ; 152.845,78.283 153.881,82.147 ; 152.845,95.669 153.881,91.806 ; 152.876,85.048 154.485,86.398 ; 152.877,88.905 154.486,87.555 ; 153.087,72.122 153.255,73.318 ; 153.087,101.83 153.255,100.634 ; 153.246,84.678 154.596,86.287 ; 153.247,89.275 154.597,87.666 ; 153.347,72.088 153.494,73.287 ; 153.347,101.864 153.494,100.666 ; 153.607,72.058 153.733,73.26 ; 153.607,101.894 153.733,100.693 ; 153.612,78.113 154.307,82.052 ; 153.612,95.839 154.307,91.9 ; 153.675,84.378 154.725,86.197 ; 153.675,89.574 154.725,87.756 ; 153.868,101.919 154.042,99.927 ; 153.973,73.236 153.867,72.033 154.042,74.026 ; 154.128,72.013 154.213,73.218 ; 154.129,101.94 154.213,100.735 ; 154.148,84.157 154.867,86.131 ; 154.149,89.795 154.867,87.822 ; 154.39,71.997 154.453,73.203 ; 154.39,78.01 154.739,81.995 ; 154.39,95.942 154.739,91.957 ; 154.39,101.956 154.453,100.749 ; 154.651,71.985 154.694,73.192 ; 154.651,101.967 154.693,100.76 ; 154.654,84.022 155.018,86.09 ; 154.654,89.931 155.019,87.863 ; 154.913,71.978 154.934,73.186 ; 154.913,101.974 154.934,100.766 ; 155.175,71.976 155.175,75.976 ; 155.175,77.976 155.175,81.976 ; 155.175,83.976 155.175,86.076 ; 155.175,97.976 155.175,101.976 ; 146.175,86.976 150.175,86.976 146.175,86.976 ; 152.175,86.976 154.275,86.976 152.175,86.977 ; 155.175,87.876 155.175,89.976 155.175,87.876 ; 155.175,91.976 155.175,95.976 155.175,91.976

## Polygon pours and split planes (outlines as drawn)
no net on Top Layer "NONET_L01_P000" (solid, pour order 0): 157.175,111.976 157.175,61.976 67.175,61.976 67.175,111.976

## Keep-outs
Keep-Out Layer:
  lines w0.01: 155.175,75.976 cw(c155.175,86.976) 155.175,97.976 155.175,95.976 ccw(c155.175,86.976) 155.175,77.976 155.175,75.976 ; 155.175,75.98 cw(c155.175,86.98) 155.175,97.98 155.175,95.98 ccw(c155.175,86.98) 155.175,77.98 155.175,75.98 ; 155.175,81.976 cw(c155.175,86.976) 155.175,91.976 155.175,89.976 ccw(c155.175,86.976) 155.175,83.976 155.175,81.976 ; 155.175,81.98 cw(c155.175,86.98) 155.175,91.98 155.175,89.98 ccw(c155.175,86.98) 155.175,83.98 155.175,81.98
  lines w0.305: 67.175,61.976 157.175,61.976 157.175,111.976 67.175,111.976 67.175,61.976

## Other copper
Bottom Layer:
  text "4" at 70.675,108.176 h1.5
  text "3" at 71.675,108.176 h1.5
  text "2" at 72.675,108.176 h1.5
  text "1" at 73.675,108.176 h1.5
  text "9" at 75.675,108.176 h1.5
  text "8" at 76.675,108.176 h1.5
  text "7" at 77.675,108.176 h1.5
  text "6" at 78.675,108.176 h1.5
  text "4" at 80.675,108.176 h1.5
  text "3" at 81.675,108.176 h1.5
  text "2" at 82.675,108.176 h1.5
  text "1" at 83.675,108.176 h1.5
  text "9" at 85.675,108.176 h1.5
  text "8" at 86.675,108.176 h1.5
  text "7" at 87.675,108.176 h1.5
  text "6" at 88.675,108.176 h1.5
  text "4" at 90.675,108.176 h1.5
  text "3" at 91.675,108.176 h1.5
  text "2" at 92.675,108.176 h1.5
  text "1" at 93.675,108.176 h1.5
  text "9" at 95.675,108.176 h1.5
  text "8" at 96.675,108.176 h1.5
  text "7" at 97.675,108.176 h1.5
  text "6" at 98.675,108.176 h1.5
  text "4" at 100.675,108.176 h1.5
  text "3" at 101.675,108.176 h1.5
  text "2" at 102.675,108.176 h1.5
  text "1" at 103.675,108.176 h1.5
  text "9" at 105.675,108.176 h1.5
  text "8" at 106.675,108.176 h1.5
  text "7" at 107.675,108.176 h1.5
  text "6" at 108.675,108.176 h1.5
  text "4" at 110.675,108.176 h1.5
  text "3" at 111.675,108.176 h1.5
  text "2" at 112.675,108.176 h1.5
  text "1" at 113.675,108.176 h1.5
  text "9" at 115.675,108.176 h1.5
  text "8" at 116.675,108.176 h1.5
  text "7" at 117.675,108.176 h1.5
  text "6" at 118.675,108.176 h1.5
  text "4" at 120.675,108.176 h1.5
  text "3" at 121.675,108.176 h1.5
  text "2" at 122.675,108.176 h1.5
  text "1" at 123.675,108.176 h1.5
  text "9" at 125.675,108.176 h1.5
  text "8" at 126.675,108.176 h1.5
  text "7" at 127.675,108.176 h1.5
  text "6" at 128.675,108.176 h1.5
  text "4" at 130.675,108.176 h1.5
  text "3" at 131.675,108.176 h1.5
  text "2" at 132.675,108.176 h1.5
  text "1" at 133.675,108.176 h1.5
  text "9" at 135.675,108.176 h1.5
  text "8" at 136.675,108.176 h1.5
  text "7" at 137.675,108.176 h1.5
  text "6" at 138.675,108.176 h1.5
  text "4" at 140.675,108.176 h1.5
  text "3" at 141.675,108.176 h1.5
  text "2" at 142.675,108.176 h1.5
  text "1" at 143.675,108.176 h1.5
  text "9" at 145.675,108.176 h1.5
  text "8" at 146.675,108.176 h1.5
  text "7" at 147.675,108.176 h1.5
  text "6" at 148.675,108.176 h1.5
  text "4" at 150.675,108.176 h1.5
  text "3" at 151.675,108.176 h1.5
  text "2" at 152.675,108.176 h1.5
  text "1" at 153.675,108.176 h1.5
  text "cm" at 155.425,108.126 h1.27 r270
  text "5" at 149.775,106.876 h1.5
  text "5" at 69.775,106.826 h1.5
  text "5" at 79.775,106.826 h1.5
  text "5" at 89.775,106.826 h1.5
  text "5" at 99.775,106.826 h1.5
  text "5" at 109.775,106.826 h1.5
  text "5" at 119.775,106.826 h1.5
  text "5" at 129.775,106.826 h1.5
  text "5" at 139.775,106.826 h1.5
  text "8" at 76.375,105.376 h3
  text "7" at 86.375,105.376 h3
  text "6" at 96.375,105.376 h3
  text "5" at 106.375,105.376 h3
  text "4" at 116.375,105.376 h3
  text "3" at 126.375,105.376 h3
  text "2" at 136.375,105.376 h3
  text "1" at 146.375,105.376 h3
  text "0" at 156.375,105.376 h3
  text "4.0" at 109.175,105.226 h0.64
  text "3.5" at 114.175,105.226 h0.64
  text "3.0" at 119.675,104.976 h0.64
  text "2.5" at 123.175,104.976 h0.64
  text "2.0" at 125.925,104.476 h0.64
  text "1.9" at 128.425,104.476 h0.64
  text "1.8" at 130.925,104.476 h0.64
  text "1.7" at 133.425,104.476 h0.64
  text "1.6" at 135.654,104.476 h0.64
  text "1.5" at 137.853,104.476 h0.64
  text "1.4" at 139.925,104.476 h0.64
  text "1.3" at 141.896,104.476 h0.64
  text "1.2" at 143.874,103.921 h0.64
  text "1.1" at 145.499,103.921 h0.64
  text "1.0" at 147.124,103.921 h0.64
  text ".9" at 148.311,103.921 h0.64
  text ".8" at 149.55,103.921 h0.64
  text ".7" at 150.675,103.921 h0.64
  text ".6" at 151.925,103.921 h0.64
  text ".5" at 153.05,103.921 h0.64
  text ".4" at 154.175,103.921 h0.64
  text ".3" at 155.3,103.921 h0.64
  text ".2" at 156.425,103.921 h0.64
  text "mm (mil)" at 72.575,103.276 h1.5
  text "0.1" at 74.1,101.876 h0.64
  text "(5)" at 74.1,101.026 h0.64
  text "(6)" at 74.075,100.051 h0.64
  text "0.2" at 74.175,99.176 h0.64
  text "1" at 154.064,98.458 h1.5 r10
  text "1" at 154.064,98.458 h1.5 r10
  text "0.3" at 74.175,98.276 h0.64
  text "2" at 152.087,98.09 h1.5 r20
  text "2" at 152.087,98.09 h1.5 r20
  text "3" at 150.204,97.385 h1.5 r30
  text "3" at 150.204,97.385 h1.5 r30
  text "0.4" at 74.175,97.226 h0.64
  text "4" at 148.472,96.364 h1.5 r40
  text "4" at 148.472,96.364 h1.5 r40
  text "0.5" at 74.175,95.976 h0.64
  text "5" at 146.944,95.058 h1.5 r50
  text "5" at 146.944,95.058 h1.5 r50
  text "0.6" at 74.175,94.726 h0.64
  text "6" at 145.666,93.506 h1.5 r60
  text "6" at 145.666,93.506 h1.5 r60
  text "0.7" at 74.175,93.226 h0.64
  text "7" at 144.676,91.755 h1.5 r70
  text "7" at 144.676,91.755 h1.5 r70
  text "0.8" at 74.175,91.726 h0.64
  text "0.9" at 74.175,90.476 h0.64
  text "8" at 144.006,89.859 h1.5 r80
  text "8" at 144.006,89.859 h1.5 r80
  text "1.0" at 74.175,88.976 h0.64
  text "9" at 143.675,87.876 h1.5 r90
  text "9" at 143.675,87.876 h1.5 r90
  text "(50)" at 74.425,87.476 h0.64
  text "10" at 143.572,86.555 h1.5 r100
  text "10" at 143.572,86.555 h1.5 r100
  text "(60)" at 74.425,85.726 h0.64
  text "11" at 143.821,84.546 h1.5 r110
  text "11" at 143.821,84.546 h1.5 r110
  text "1.7" at 74.175,83.701 h0.64
  text "12" at 144.416,82.612 h1.5 r120
  text "12" at 144.416,82.612 h1.5 r120
  text "2.0" at 74.175,81.451 h0.64
  text "13" at 145.337,80.81 h1.5 r130
  text "13" at 145.337,80.81 h1.5 r130
  text "14" at 146.557,79.195 h1.5 r140
  text "14" at 146.557,79.195 h1.5 r140
  text "2.5" at 74.175,78.726 h0.64
  text "15" at 148.039,77.817 h1.5 r150
  text "15" at 148.039,77.817 h1.5 r150
  text "16" at 149.738,76.717 h1.5 r160
  text "16" at 149.738,76.717 h1.5 r160
  text "17" at 151.602,75.929 h1.5 r170
  text "17" at 151.602,75.929 h1.5 r170
  text "3.0" at 74.175,75.701 h0.64
  text "18" at 153.575,75.476 h1.5 r180
  text "18" at 153.575,75.476 h1.5 r180
  text "1" at 94.106,69.404 h3 r180
  text "2" at 119.507,69.404 h3 r180
  text "0" at 68.727,69.371 h3 r180
  text "3" at 144.927,69.371 h3 r180
  text "5" at 82.995,68.639 h1.5 r180
  text "5" at 108.395,68.639 h1.5 r180
  text "5" at 133.795,68.639 h1.5 r180
  text "1" at 72.835,67.623 h1.5 r180
  text "2" at 75.375,67.623 h1.5 r180
  text "3" at 77.915,67.623 h1.5 r180
  text "4" at 80.455,67.623 h1.5 r180
  text "6" at 85.535,67.623 h1.5 r180
  text "7" at 88.175,67.623 h1.5 r180
  text "8" at 90.715,67.623 h1.5 r180
  text "9" at 93.255,67.623 h1.5 r180
  text "1" at 98.235,67.623 h1.5 r180
  text "2" at 100.775,67.623 h1.5 r180
  text "3" at 103.315,67.623 h1.5 r180
  text "4" at 105.855,67.623 h1.5 r180
  text "6" at 110.935,67.623 h1.5 r180
  text "7" at 113.475,67.623 h1.5 r180
  text "8" at 116.015,67.623 h1.5 r180
  text "9" at 118.555,67.623 h1.5 r180
  text "1" at 123.635,67.623 h1.5 r180
  text "2" at 126.175,67.623 h1.5 r180
  text "3" at 128.715,67.623 h1.5 r180
  text "4" at 131.255,67.623 h1.5 r180
  text "6" at 136.335,67.623 h1.5 r180
  text "7" at 138.875,67.623 h1.5 r180
  text "8" at 141.415,67.623 h1.5 r180
  text "9" at 143.955,67.623 h1.5 r180
  text "1" at 149.035,67.623 h1.5 r180
  text "2" at 151.575,67.623 h1.5 r180
  text "3" at 154.115,67.623 h1.5 r180
  text "Inch" at 69.925,66.226 h1.27 r90

## Silkscreen, mask and mechanical layers (free items; w line width, h text height)
Top Overlay:
  region: 155.175,77.98 cw(c155.175,86.98) 155.175,95.98 155.175,94.98 ccw(c155.175,86.98) 155.175,78.98
  region: 155.175,83.98 cw(c155.175,86.98) 155.175,89.98 155.175,88.98 ccw(c155.175,86.98) 155.175,84.98
  region: 108.425,99.73
  region: 108.425,107.518 108.425,106.48 156.675,103.48
  region: 108.425,111.98 108.425,110.693 156.675,103.48
  region: 152.675,86.48 155.175,86.48 155.175,87.48 152.675,87.48
  region: 146.675,86.48 150.175,86.48 150.175,87.48 146.675,87.48
  region: 108.425,111.98 96.925,111.98 98.175,111.48 108.425,110.693
  region: 96.925,111.98 108.425,107.518 108.425,106.48
  region: 157.175,99.06 157.175,98.48 108.425,99.98
  region: 108.425,99.98 157.175,101.93 157.175,102.48
  region: 138.676,106.642 153.441,111.976 152.146,111.976
  region: 138.676,106.642
  region: 157.175,110.515 138.676,106.642 157.175,109.906
  lines w0.01: 155.175,88.972 155.175,89.972 ; 155.175,88.98 ccw(c155.175,86.98) 155.175,84.98 155.175,83.98 cw(c155.175,86.98) 155.175,89.98 ; 152.675,86.722 152.675,87.23 155.175,87.23 155.175,86.722 152.675,86.722 ; 155.175,77.98 cw(c155.175,86.98) 155.175,95.98 155.175,94.98 ccw(c155.175,86.98) 155.175,78.98 155.175,77.98
Bottom Overlay:
  lines w0.16: 141.275,103.226 155.925,103.226
  lines w0.32: 127.874,103.226 141.275,103.226 141.261,103.24
  lines w0.64: 110.541,103.226 127.874,103.226
  text "0402" at 78.125,104.15 h0.8
  text "(1005)" at 78.325,103.15 h0.8
  text "SMC" at 97.975,101.476 h0.8
  text "0603" at 78.091,101.425 h0.8
  text "(1608)" at 78.292,100.425 h0.8
  text "SOP20" at 104.4,99.926 h0.8
  text "QSOP24" at 113.1,99.926 h0.8
  text "SSOP20" at 122.25,99.926 h0.8
  text "SOP8" at 130.725,99.926 h0.8
  text "TSSOP8" at 139.5,99.926 h0.8
  text "0805" at 78.125,98.701 h0.8
  text "(2012)" at 78.325,97.701 h0.8
  text "SMB" at 97.975,96.226 h0.8
  text "1206" at 77.995,95.95 h0.8
  text "(3216)" at 78.292,94.95 h0.8
  text "TQFP48" at 138.375,93.451 h0.8
  text "1210" at 77.925,92.226 h0.8
  text "SMA" at 97.975,91.726 h0.8
  text "QFN56" at 126.3,91.401 h0.8
  text "(3225)" at 78.425,91.226 h0.8
  text "SOD8" at 97.975,88.176 h0.8
  text "TSSOP10" at 115.868,88.048 h0.8
  text "WQFN10" at 108.575,87.876 h0.8
  text "1812" at 77.925,87.501 h0.8
  text "DFN10" at 103.05,86.576 h0.8
  text "(4832)" at 78.425,86.251 h0.8
  text "SOD123" at 97.975,84.951 h0.8
  text "2010" at 78.025,83.201 h0.8
  text "SOD323" at 97.975,82.201 h0.8
  text "(5025)" at 78.425,81.951 h0.8
  text "XT7535" at 134.725,79.526 h0.8
  text "SOD523" at 97.975,79.476 h0.8
  text "XT6035" at 140.15,78.976 h0.8
  text "2512" at 78.025,78.701 h0.8
  text "(6432)" at 78.392,77.451 h0.8
  text "SOD723" at 97.975,77.226 h0.8
  text "XT3225" at 144.35,75.651 h0.8
  text "SC70-6" at 77.058,70.414 h0.8
  text "SOT25" at 81.249,70.414 h0.8
  text "SOT26" at 86.355,70.414 h0.8
  text "SOT28" at 91.181,70.414 h0.8
  text "SOT23" at 96.007,70.414 h0.8
  text "SOT89" at 101.391,70.414 h0.8
  text "SOT223" at 108.961,70.414 h0.8
  text "TO-252" at 122.175,70.351 h0.8
Top Solder:
  drawing of 6090 lines, arcs and shapes, not listed
  text "惠琦" at 94.31,100.584 h5
  text "Qi Hui" at 72.663,100.476 h8
  text "IEEE Student Member" at 72.663,94.226 h4
  text "Research Assistant (CMEAPS)" at 72.663,90.226 h4
  text "Nanjing University of Aeronautics and Astronautics" at 72.175,68.98 h4
  text "E-mail: hq@nuaa.edu.cn" at 115.675,64.988 h4
  text "TEL: (086) 15651662692" at 72.175,64.98 h4
Bottom Solder:
  drawing of 258 lines, arcs and shapes, not listed
  text "4" at 70.675,108.176 h1.5
  text "3" at 71.675,108.176 h1.5
  text "2" at 72.675,108.176 h1.5
  text "1" at 73.675,108.176 h1.5
  text "9" at 75.675,108.176 h1.5
  text "8" at 76.675,108.176 h1.5
  text "7" at 77.675,108.176 h1.5
  text "6" at 78.675,108.176 h1.5
  text "4" at 80.675,108.176 h1.5
  text "3" at 81.675,108.176 h1.5
  text "2" at 82.675,108.176 h1.5
  text "1" at 83.675,108.176 h1.5
  text "9" at 85.675,108.176 h1.5
  text "8" at 86.675,108.176 h1.5
  text "7" at 87.675,108.176 h1.5
  text "6" at 88.675,108.176 h1.5
  text "4" at 90.675,108.176 h1.5
  text "3" at 91.675,108.176 h1.5
  text "2" at 92.675,108.176 h1.5
  text "1" at 93.675,108.176 h1.5
  text "9" at 95.675,108.176 h1.5
  text "8" at 96.675,108.176 h1.5
  text "7" at 97.675,108.176 h1.5
  text "6" at 98.675,108.176 h1.5
  text "4" at 100.675,108.176 h1.5
  text "3" at 101.675,108.176 h1.5
  text "2" at 102.675,108.176 h1.5
  text "1" at 103.675,108.176 h1.5
  text "9" at 105.675,108.176 h1.5
  text "8" at 106.675,108.176 h1.5
  text "7" at 107.675,108.176 h1.5
  text "6" at 108.675,108.176 h1.5
  text "4" at 110.675,108.176 h1.5
  text "3" at 111.675,108.176 h1.5
  text "2" at 112.675,108.176 h1.5
  text "1" at 113.675,108.176 h1.5
  text "9" at 115.675,108.176 h1.5
  text "8" at 116.675,108.176 h1.5
  text "7" at 117.675,108.176 h1.5
  text "6" at 118.675,108.176 h1.5
  text "4" at 120.675,108.176 h1.5
  text "3" at 121.675,108.176 h1.5
  text "2" at 122.675,108.176 h1.5
  text "1" at 123.675,108.176 h1.5
  text "9" at 125.675,108.176 h1.5
  text "8" at 126.675,108.176 h1.5
  text "7" at 127.675,108.176 h1.5
  text "6" at 128.675,108.176 h1.5
  text "4" at 130.675,108.176 h1.5
  text "3" at 131.675,108.176 h1.5
  text "2" at 132.675,108.176 h1.5
  text "1" at 133.675,108.176 h1.5
  text "9" at 135.675,108.176 h1.5
  text "8" at 136.675,108.176 h1.5
  text "7" at 137.675,108.176 h1.5
  text "6" at 138.675,108.176 h1.5
  text "4" at 140.675,108.176 h1.5
  text "3" at 141.675,108.176 h1.5
  text "2" at 142.675,108.176 h1.5
  text "1" at 143.675,108.176 h1.5
  text "9" at 145.675,108.176 h1.5
  text "8" at 146.675,108.176 h1.5
  text "7" at 147.675,108.176 h1.5
  text "6" at 148.675,108.176 h1.5
  text "4" at 150.675,108.176 h1.5
  text "3" at 151.675,108.176 h1.5
  text "2" at 152.675,108.176 h1.5
  text "1" at 153.675,108.176 h1.5
  text "cm" at 155.425,108.126 h1.27 r270
  text "5" at 149.775,106.876 h1.5
  text "5" at 69.775,106.826 h1.5
  text "5" at 79.775,106.826 h1.5
  text "5" at 89.775,106.826 h1.5
  text "5" at 99.775,106.826 h1.5
  text "5" at 109.775,106.826 h1.5
  text "5" at 119.775,106.826 h1.5
  text "5" at 129.775,106.826 h1.5
  text "5" at 139.775,106.826 h1.5
  text "8" at 76.375,105.376 h3
  text "7" at 86.375,105.376 h3
  text "6" at 96.375,105.376 h3
  text "5" at 106.375,105.376 h3
  text "4" at 116.375,105.376 h3
  text "3" at 126.375,105.376 h3
  text "2" at 136.375,105.376 h3
  text "1" at 146.375,105.376 h3
  text "0" at 156.375,105.376 h3
  text "4.0" at 109.175,105.226 h0.64
  text "3.5" at 114.175,105.226 h0.64
  text "3.0" at 119.675,104.976 h0.64
  text "2.5" at 123.175,104.976 h0.64
  text "2.0" at 125.925,104.476 h0.64
  text "1.9" at 128.425,104.476 h0.64
  text "1.8" at 130.925,104.476 h0.64
  text "1.7" at 133.425,104.476 h0.64
  text "1.6" at 135.654,104.476 h0.64
  text "1.5" at 137.853,104.476 h0.64
  text "1.4" at 139.925,104.476 h0.64
  text "1.3" at 141.896,104.476 h0.64
  text "1.2" at 143.874,103.921 h0.64
  text "1.1" at 145.499,103.921 h0.64
  text "1.0" at 147.124,103.921 h0.64
  text ".9" at 148.311,103.921 h0.64
  text ".8" at 149.55,103.921 h0.64
  text ".7" at 150.675,103.921 h0.64
  text ".6" at 151.925,103.921 h0.64
  text ".5" at 153.05,103.921 h0.64
  text ".4" at 154.175,103.921 h0.64
  text ".3" at 155.3,103.921 h0.64
  text ".2" at 156.425,103.921 h0.64
  text "mm (mil)" at 72.575,103.276 h1.5
  text "0.1" at 74.1,101.876 h0.64
  text "(5)" at 74.1,101.026 h0.64
  text "(6)" at 74.075,100.051 h0.64
  text "0.2" at 74.175,99.176 h0.64
  text "1" at 154.064,98.458 h1.5 r10
  text "0.3" at 74.175,98.276 h0.64
  text "2" at 152.087,98.09 h1.5 r20
  text "3" at 150.204,97.385 h1.5 r30
  text "0.4" at 74.175,97.226 h0.64
  text "4" at 148.472,96.364 h1.5 r40
  text "0.5" at 74.175,95.976 h0.64
  text "5" at 146.944,95.058 h1.5 r50
  text "0.6" at 74.175,94.726 h0.64
  text "6" at 145.666,93.506 h1.5 r60
  text "0.7" at 74.175,93.226 h0.64
  text "7" at 144.676,91.755 h1.5 r70
  text "0.8" at 74.175,91.726 h0.64
  text "0.9" at 74.175,90.476 h0.64
  text "8" at 144.006,89.859 h1.5 r80
  text "1.0" at 74.175,88.976 h0.64
  text "9" at 143.675,87.876 h1.5 r90
  text "(50)" at 74.425,87.476 h0.64
  text "10" at 143.572,86.555 h1.5 r100
  text "(60)" at 74.425,85.726 h0.64
  text "11" at 143.821,84.546 h1.5 r110
  text "1.7" at 74.175,83.701 h0.64
  text "12" at 144.416,82.612 h1.5 r120
  text "2.0" at 74.175,81.451 h0.64
  text "13" at 145.337,80.81 h1.5 r130
  text "14" at 146.557,79.195 h1.5 r140
  text "2.5" at 74.175,78.726 h0.64
  text "15" at 148.039,77.817 h1.5 r150
  text "16" at 149.738,76.717 h1.5 r160
  text "17" at 151.602,75.929 h1.5 r170
  text "3.0" at 74.175,75.701 h0.64
  text "18" at 153.575,75.476 h1.5 r180
  text "1" at 94.106,69.404 h3 r180
  text "2" at 119.507,69.404 h3 r180
  text "0" at 68.727,69.371 h3 r180
  text "3" at 144.927,69.371 h3 r180
  text "5" at 82.995,68.639 h1.5 r180
  text "5" at 108.395,68.639 h1.5 r180
  text "5" at 133.795,68.639 h1.5 r180
  text "1" at 72.835,67.623 h1.5 r180
  text "2" at 75.375,67.623 h1.5 r180
  text "3" at 77.915,67.623 h1.5 r180
  text "4" at 80.455,67.623 h1.5 r180
  text "6" at 85.535,67.623 h1.5 r180
  text "7" at 88.175,67.623 h1.5 r180
  text "8" at 90.715,67.623 h1.5 r180
  text "9" at 93.255,67.623 h1.5 r180
  text "1" at 98.235,67.623 h1.5 r180
  text "2" at 100.775,67.623 h1.5 r180
  text "3" at 103.315,67.623 h1.5 r180
  text "4" at 105.855,67.623 h1.5 r180
  text "6" at 110.935,67.623 h1.5 r180
  text "7" at 113.475,67.623 h1.5 r180
  text "8" at 116.015,67.623 h1.5 r180
  text "9" at 118.555,67.623 h1.5 r180
  text "1" at 123.635,67.623 h1.5 r180
  text "2" at 126.175,67.623 h1.5 r180
  text "3" at 128.715,67.623 h1.5 r180
  text "4" at 131.255,67.623 h1.5 r180
  text "6" at 136.335,67.623 h1.5 r180
  text "7" at 138.875,67.623 h1.5 r180
  text "8" at 141.415,67.623 h1.5 r180
  text "9" at 143.955,67.623 h1.5 r180
  text "1" at 149.035,67.623 h1.5 r180
  text "2" at 151.575,67.623 h1.5 r180
  text "3" at 154.115,67.623 h1.5 r180
  text "Inch" at 69.925,66.226 h1.27 r90
Mechanical 1:
  lines w0.01: 155.175,71.976 cw(c155.175,86.976) 155.175,101.976 ; 155.175,75.976 cw(c155.175,86.976) 155.175,97.976 155.175,95.976 ccw(c155.175,86.976) 155.175,77.976 155.175,75.976 ; 155.175,75.98 cw(c155.175,86.98) 155.175,97.98 155.175,95.98 ccw(c155.175,86.98) 155.175,77.98 155.175,75.98 ; 155.175,81.976 cw(c155.175,86.976) 155.175,91.976 155.175,89.976 ccw(c155.175,86.976) 155.175,83.976 155.175,81.976 ; 155.175,81.98 cw(c155.175,86.98) 155.175,91.98 155.175,89.98 ccw(c155.175,86.98) 155.175,83.98 155.175,81.98